# Altium PCB KORICHE_N1.PCBDOC
Units mm, origin at the board's own origin, x right, y up, seen from the top; angles counter-clockwise.
Board outline 62.87 x 50.17 mm, 2 copper layers (TopLayer, BottomLayer); 27 components, 22 nets, 105 pads, 16 vias.
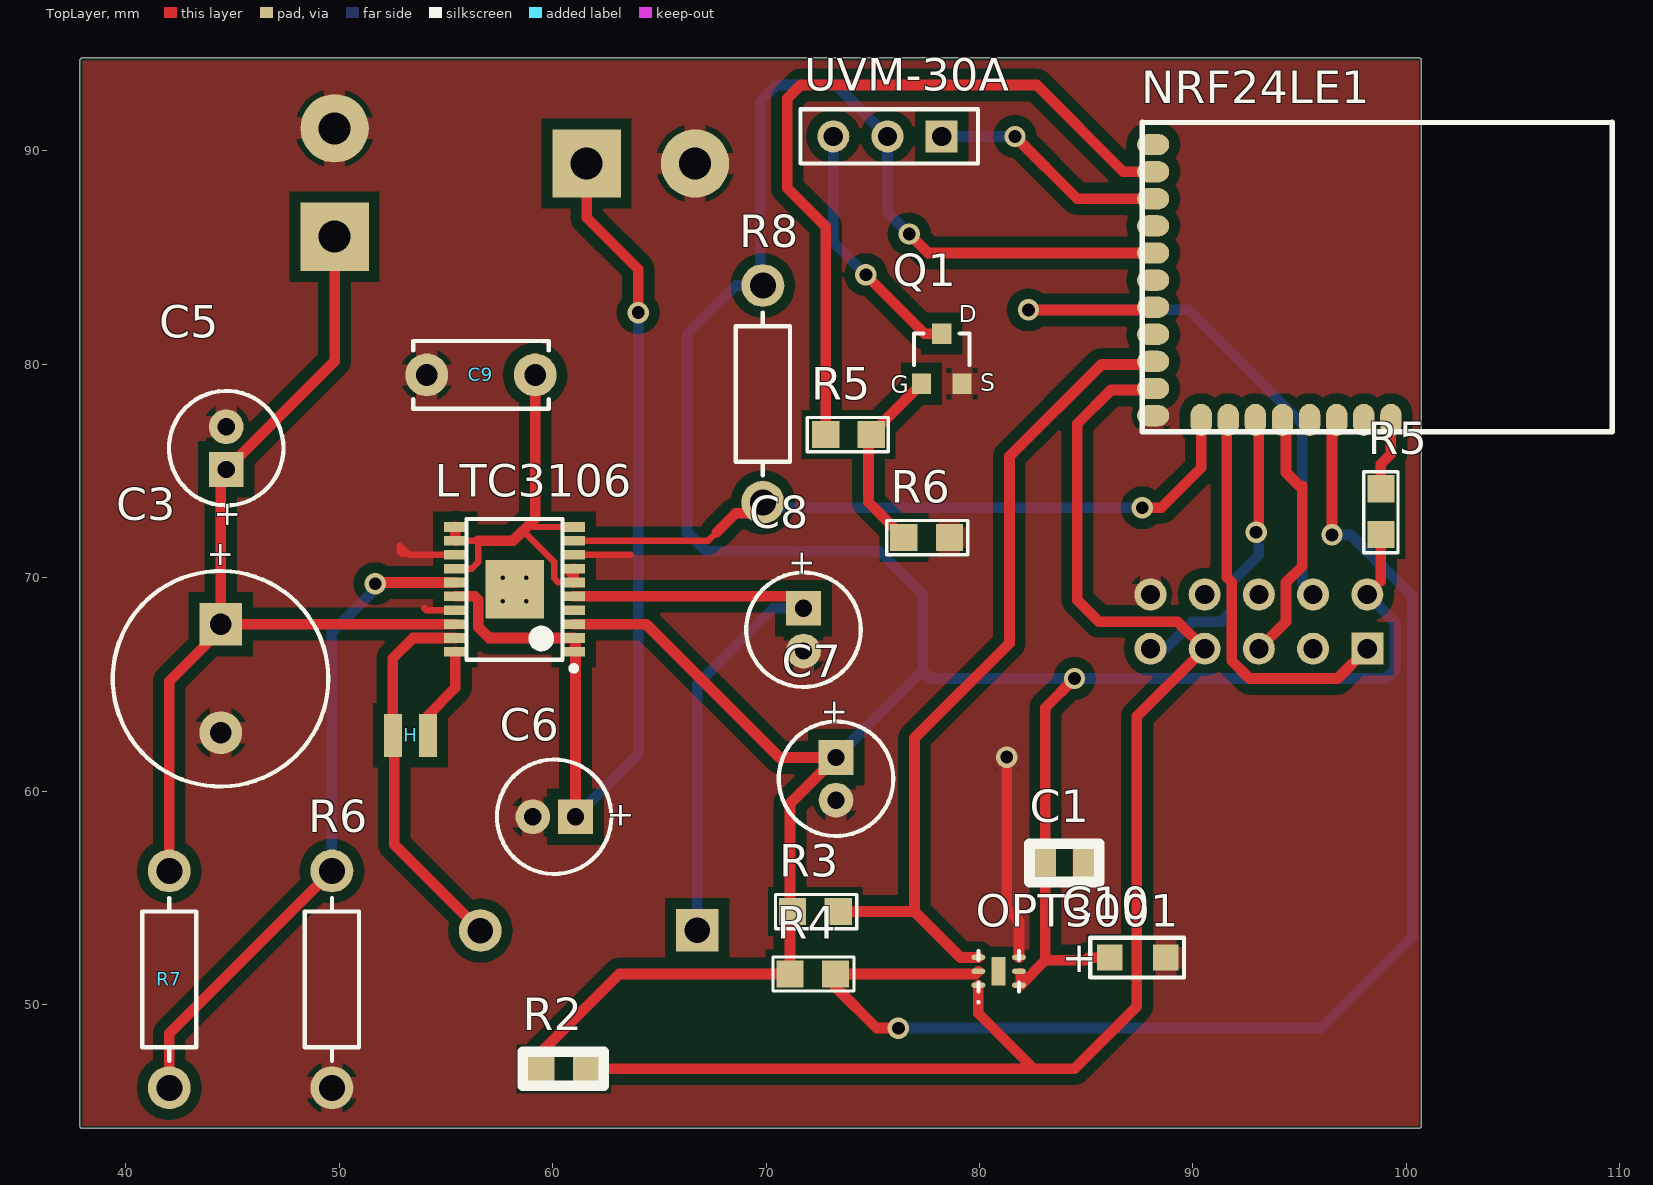
[diagram p0: TopLayer view]
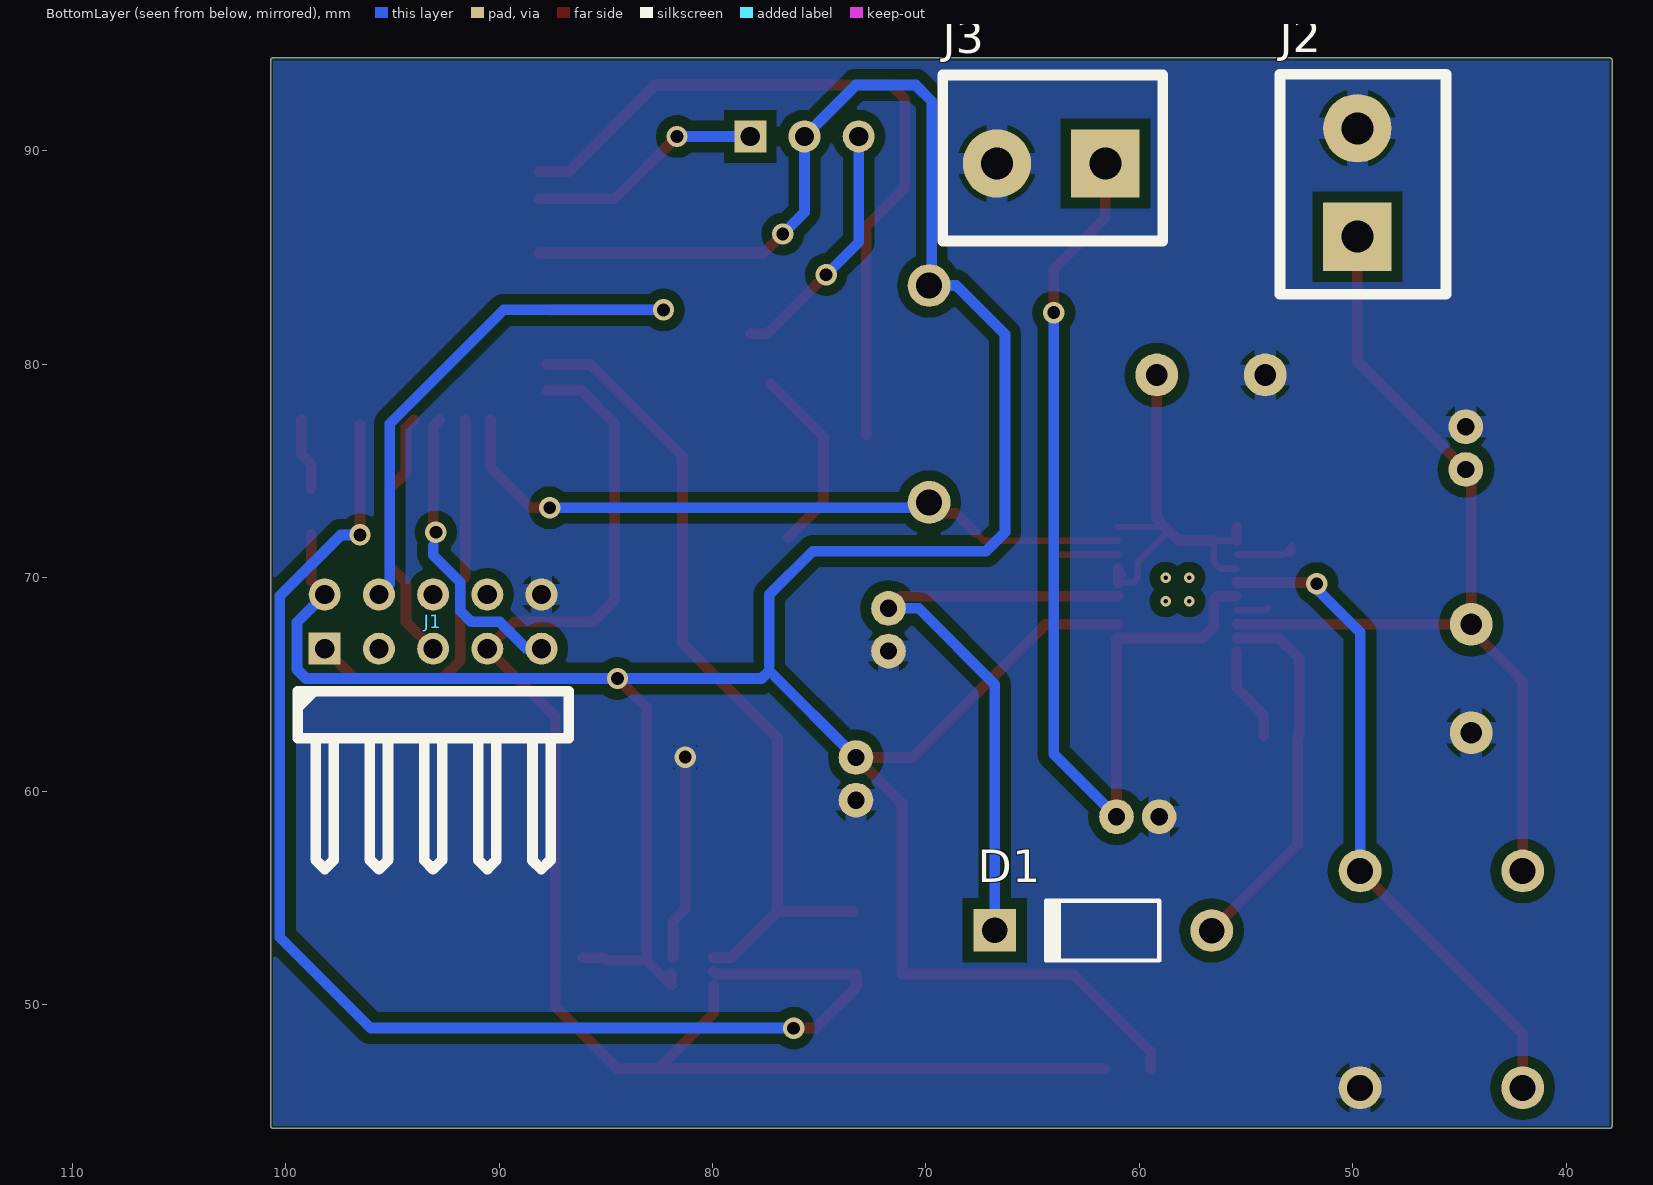
[diagram p1: BottomLayer view, seen from below]
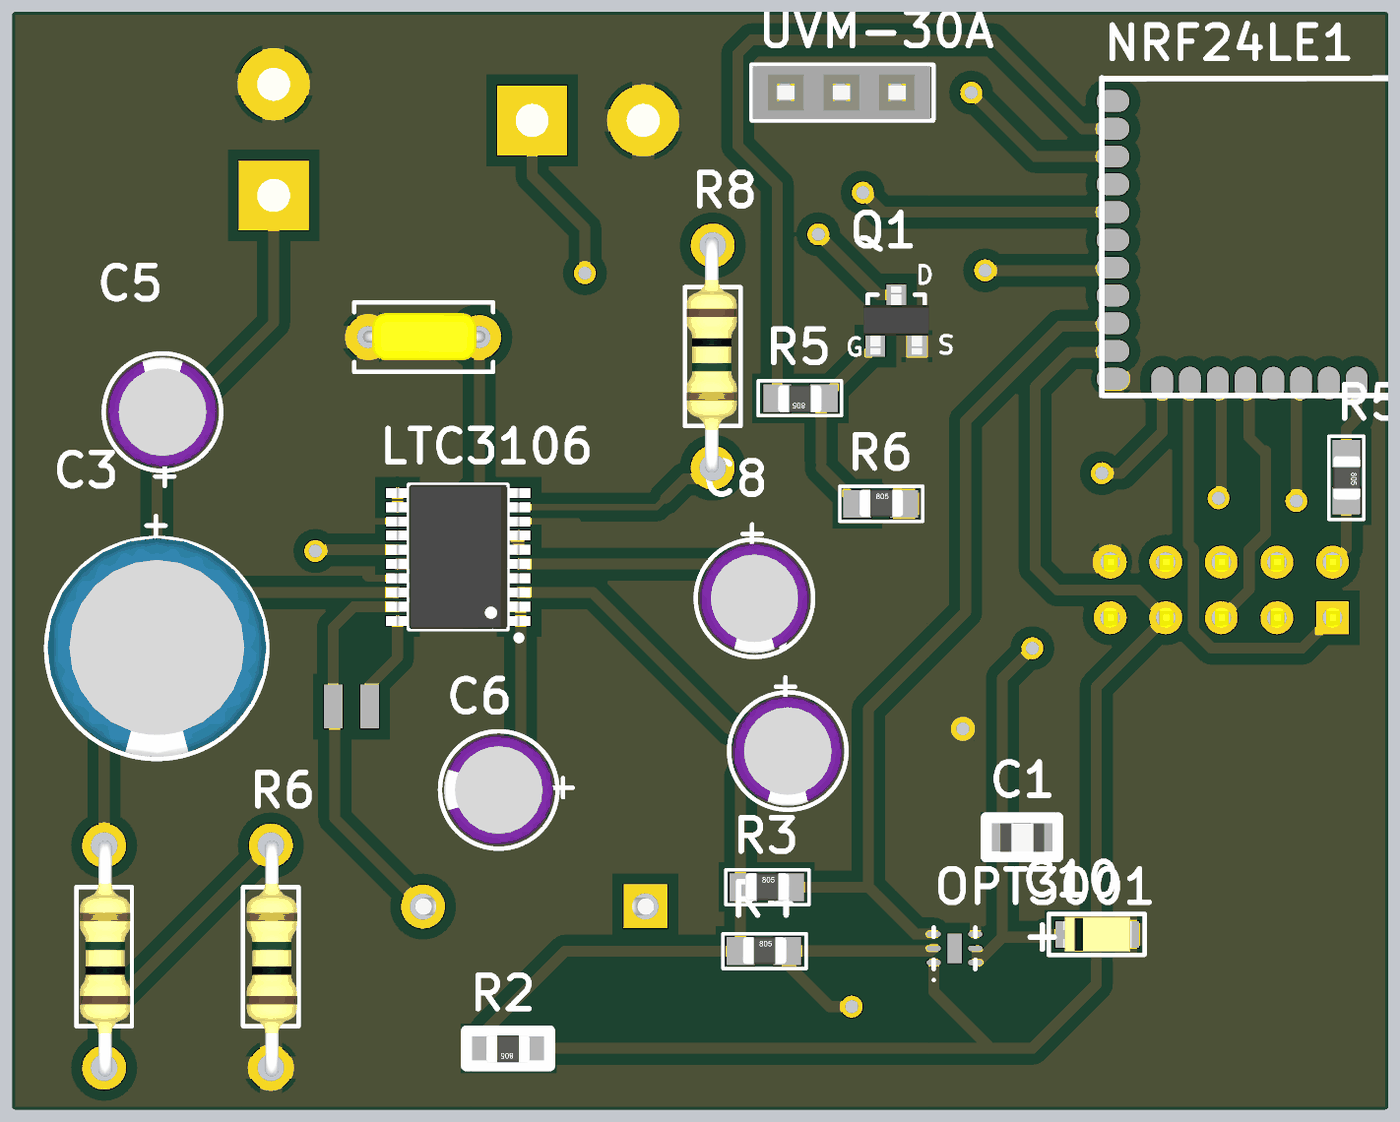
[diagram p2: 3D render of the assembled board from above, using the file's embedded part models]
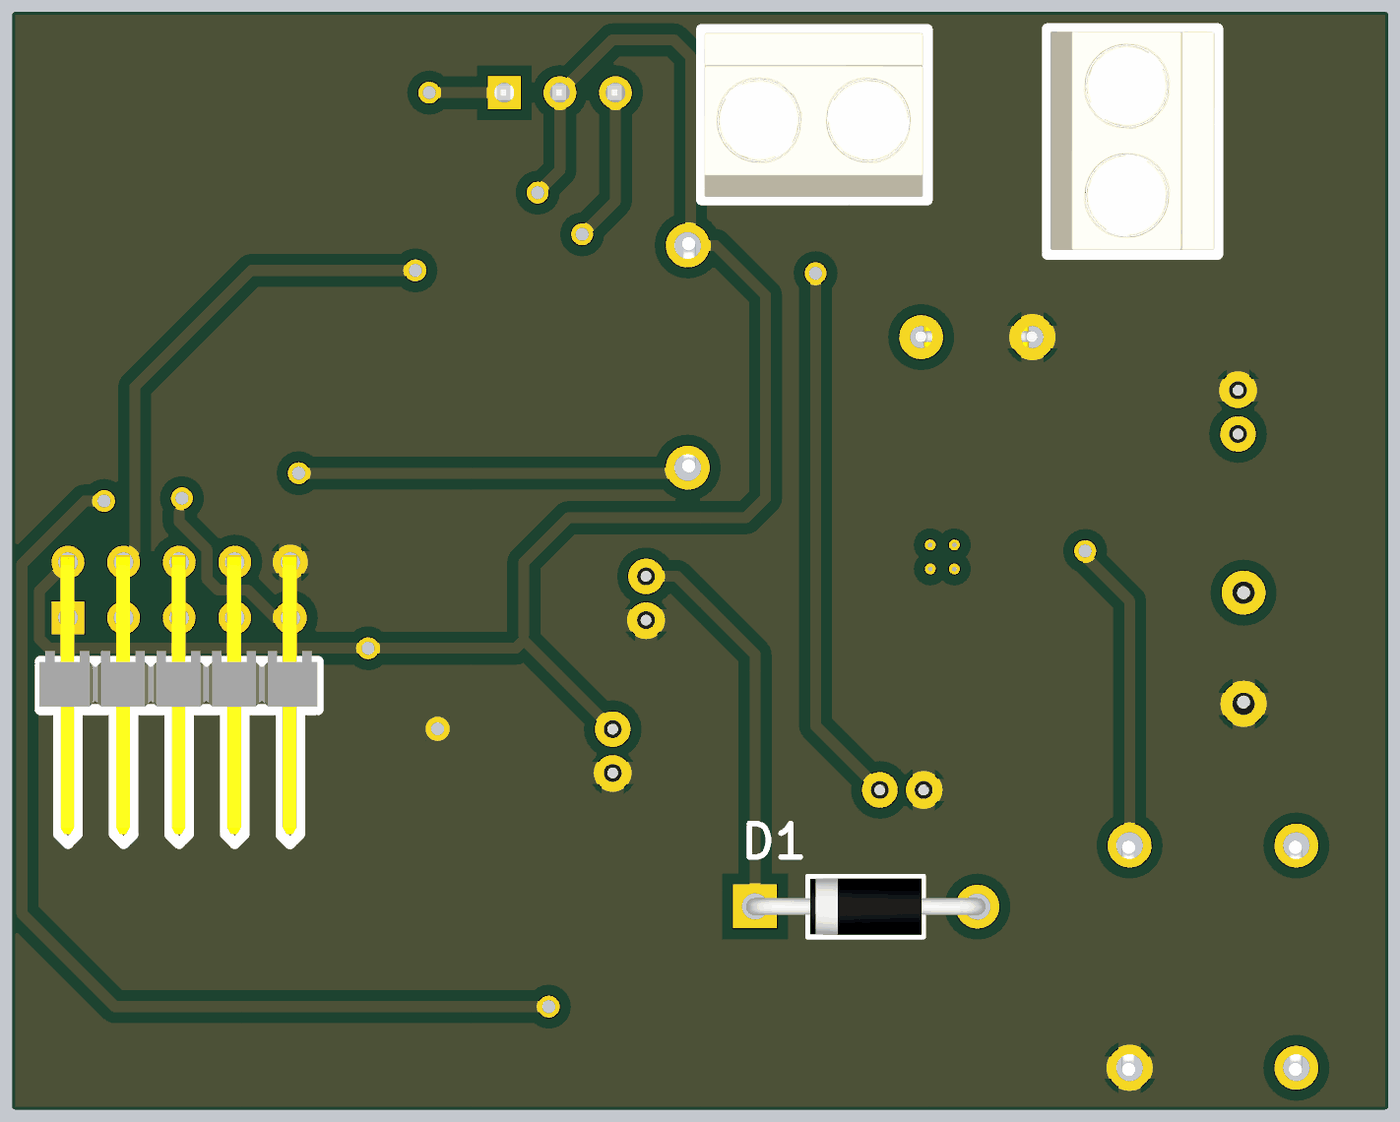
[diagram p3: 3D render of the assembled board from below, using the file's embedded part models]

## Layer stack, top to bottom
TopSolder: solder mask 0.0102, Solder Resist, Dk 3.5
TopLayer: signal copper 0.0356
Dielectric1: core 0.32, FR-4, Dk 4.8
BottomLayer: signal copper 0.0356
BottomSolder: solder mask 0.0102, Solder Resist, Dk 3.5

## Board outline
37.973,44.196 cw(c37.973,44.323) 37.846,44.323 37.846,94.234 cw(c37.973,94.234) 37.973,94.361 100.584,94.361 cw(c100.584,94.234) 100.711,94.234 100.711,44.323 cw(c100.584,44.323) 100.584,44.196

## Design rules (kind name [scope] priority, off if disabled: settings)
Clearance Clearance_11 [InNamedPolygon('GND_L02_P010')] p1: gap=0.5
Clearance Clearance_10 [InNamedPolygon('GND_L01_P008')] p2: gap=0.5
Clearance Clearance_9 [InNamedPolygon('bot-No Net')] p3: gap=0.5
Clearance Clearance_8 [InNamedPolygon('top-No Net')] p4: gap=0.5
Clearance Clearance_7 [InNamedPolygon('GND_L02_P036')] p5: gap=0.254
Clearance Clearance_6 [InNamedPolygon('NONET_L01_P004')] p6: gap=0.5
Clearance Clearance_5 [InNamedPolygon('NONET_L01_P004')] p7: gap=0.5
Clearance Clearance_4 [InNamedPolygon('NONET_L01_P004')] p8: gap=0.5
Clearance Clearance_3 [InNamedPolygon('NONET_L01_P004')] p9: gap=0.5
Clearance Clearance_2 [InNamedPolygon('NONET_L01_P004')] p10: gap=0.5
Clearance Clearance_1 [InNamedPolygon('NONET_L02_P005') Or  InNamedPolygon('NONET_L01_P004')] p11: gap=0.5
Clearance PowerPlaneClearance [InNamedPolygon('NONET_L02_P005') Or  InNamedPolygon('NONET_L01_P004')] p12: gap=1.016
Clearance [All] p13: gap=0.3
FabricationTestPointUsage TestPointUsage [All] p1: valid=0 allowmultiple=FALSE
FabricationTestpoint Testpoint [All] p1: side=3 testpointundercomponent=TRUE minsize=1.016 maxsize=2.54 preferedsize=1.524 minholesize=0.508 maxholesize=1.016 preferedholesize=0.813 testpointgrid=0.025 allowsidetop=TRUE allowsidebottom=TRUE usegrid=TRUE gridtolerance=0
Height [All] p1: minheight=0 maxheight=50.8 prefheight=12.7
HoleSize [All] p1: absolutevalues=TRUE maxlimit=7.62 minlimit=0.025 maxpercent=80.000 minpercent=20.000
PlaneClearance [All] p1: clearance=1.016
PlaneConnect [All] p1: planeconnectstyle=Relief reliefexpansion=0.5 reliefentries=4 reliefconductorwidth=1.016 reliefairgap=0.5
PolygonConnect [All] p1: connectstyle=Relief reliefconductorwidth=1.016 reliefentries=4 polygonreliefangle="90 Angle" airgapwidth=0.254
RoutingVias [All] p1: holewidth=0.6 width=1.524 viastyle="Through Hole" minholewidth=0.6 minwidth=1.524 maxholewidth=0.6 maxwidth=1.524
SilkToSolderMaskClearance SilkscreenOverComponentPads [IsPad] p1: minsilkscreentomaskgap=0.254 clearancetoexposedcopper=TRUE
SolderMaskExpansion [All] p1: expansion=0.05
Width [All] p1: maxlimit=3 minlimit=0.3 preferedwidth=0.5 minimp=50.000000 maximp=50.000000 favimp=50.000000
22 further rules are at their usual default settings.

## Classes and differential pairs
component class projet_pcb_GPE: C1 C3 C5 C6 C7 C8 C9 C10 D1 H J1 J2 J3 LTC3106 NRF24LE1 OPT3001 Q1 R2 R3 R4 R5 R6 R7 R8 UVM-30A

## Components (designator, comment, footprint, x,y, rotation, side; value= is the part's Value field where it differs from the comment)
C1 "CMS_0805" CONDENSATEUR_CMS_0805 83.087,56.642 r0 top
C3 "CONDENSATEUR_POL_ELECTROLY_RAD_5.08/10.16" CONDENSATEUR_POLARISE_ELECTROLYTIQUE_RADIAL_5.08/10.16 44.45,67.818 r270 top
C5 "CONDENSATEUR_POL_ELECTROLY_RAD_2.0/5.08" CONDENSATEUR_POLARISE_ELECTROLYTIQUE_RADIAL_2.0/5.08 44.704,76.073 r90 top
C6 "CONDENSATEUR_POL_ELECTROLY_RAD_2.0/5.08" CONDENSATEUR_POLARISE_ELECTROLYTIQUE_RADIAL_2.0/5.08 60.071,58.801 r180 top
C7 "CONDENSATEUR_POL_ELECTROLY_RAD_2.0/5.08" CONDENSATEUR_POLARISE_ELECTROLYTIQUE_RADIAL_2.0/5.08 73.279,60.579 r270 top
C8 "CONDENSATEUR_POL_ELECTROLY_RAD_2.0/5.08" CONDENSATEUR_POLARISE_ELECTROLYTIQUE_RADIAL_2.0/5.08 71.755,67.564 r270 top
C9 "CONDENSATEUR_CER_RAD_5.08" CONDENSATEUR_CERAMIQUE_RADIAL_5.08 59.182,79.502 r180 top
C10 "CMS_POLARISE_TANTALE_3216-18" CONDENSATEUR_CMS_POLARISE_TANTALE_A/3216-18 86.106,52.197 r0 top
D1 "DIODE_SCHOTTKY_DO41 : 1N5817" DIODE_DO41 61.722,53.467 r0 bottom
H "Bobine_22nH" SELF 53.34,62.611 r180 top
J1 "BARRETTE_5 CONTACTS_2 RANGEES_MALE_COUDEE" BARRETTE_5X2_M_C 98.171,66.675 r180 bottom
J2 "BORNIER2 DROIT A VIS" BORNIER2_A_VIS 49.784,85.979 r90 bottom
J3 "BORNIER2 DROIT A VIS" BORNIER2_A_VIS 61.595,89.408 r0 bottom
LTC3106 "LTC3106_Regulateur" ltc3106 47.117,81.153 r180 top
NRF24LE1 "NRF24LE1_32Pin" "NRF24LE1 SMD" 88.138,77.597 r90 top
OPT3001 "OPT 3001 Light" "opt3001 DPN 6" 80.899,51.562 r90 top
Q1 "TRANSISTOR_MOSFET-N_SOT23_GSD" TRANSISTOR_MOSFET-N_SOT23_GSD 78.232,80.264 r0 top
R2 "RESISTANCE_CMS_0805" RESISTANCE_CMS_0805 61.595,46.99 r180 top
R3 "RESISTANCE_CMS_0805" RESISTANCE_CMS_0805 71.247,54.356 r0 top
R4 "RESISTANCE_CMS_0805" RESISTANCE_CMS_0805 71.12,51.435 r0 top
R5 "RESISTANCE_CMS_0805" RESISTANCE_CMS_0805 74.93,76.708 r180 top
R5 "RESISTANCE_CMS_0805" RESISTANCE_CMS_0805 98.806,74.168 r270 top
R6 "RESISTANCE_CMS_0805" RESISTANCE_CMS_0805 76.454,71.882 r0 top
R6 "RESISTANCE_AXIALE_1/4W" RESISTANCE_1/4W 49.657,46.101 r90 top
R7 "RESISTANCE_AXIALE_1/4W" RESISTANCE_1/4W 42.037,46.101 r90 top
R8 "RESISTANCE_AXIALE_1/4W" RESISTANCE_1/4W 69.85,83.693 r270 top
UVM-30A "UVM-30A UV sensor" BARRETTE_3_F_D 78.232,90.678 r180 top

## Footprints (in the part's own frame and the unit in brackets; to place one, negate y for a bottom-side part, rotate by r counter-clockwise, add the part's x,y. Pads: shape width x height; smd on the part's side, far side on the other; paste and mask are expansions set on the pad)
BARRETTE_3_F_D [mm] "BARRETTE 3 CONTACTS ; 1 RANGEE ; DROITE ; FEMELLE ; ESPACEMENT BROCHES = 2.54 mm"
  rect 1.5x1.5 hole 0.9: 1(0,0)
  round 1.5 hole 0.9: 2(2.54,0) 3(5.08,0)
  silkscreen extent -1.7,-1.27 6.61,1.27, body extent -1.56,-1.21 6.56,1.2, height 8.5
BARRETTE_5X2_M_C [mm] "BARRETTE 5 CONTACTS ; 2 RANGEES ; COUDEE ; MALE ; ESPACEMENT BROCHES = 2.54 mm"
  rect 1.5x1.5 hole 0.9: 1(0,0)
  round 1.5 hole 0.9: 2(0,2.54) 3(2.54,0) 4(2.54,2.54) 5(5.08,0) 6(5.08,2.54) 7(7.62,0) 8(7.62,2.54) 9(10.16,0) 10(10.16,2.54)
  silkscreen extent -1.27,-10.34 11.43,-2, body extent -1.3,-9.9 11.4,2.86, height 5.64
BORNIER2_A_VIS [mm] "BORNIER 2 PLOTS A VIS ; VERTICAL ; ESPACEMENT BROCHES = 5.08mm"
  rect 3.2x3.2 hole 1.5: 1(0,0)
  round 3.2 hole 1.5: 2(5.08,0)
  silkscreen extent -2.69,-4.15 7.62,3.63, body extent -2.5,-4 7.5,3.5, height 10
CONDENSATEUR_CERAMIQUE_RADIAL_5.08 [mil] "CONDENSATEUR TRAVERSANT CERAMIQUE RADIAL ; DIMENSIONS : 3.17mm x 5.08mm"
  round 79 hole 40: 1(0,0) 2(200,0)
  silkscreen extent -25,-62 225,63, body extent -11,-43 209,42, height 148
CONDENSATEUR_CMS_0805 [mm] "CONDENSATEUR CMS 0805 ; DIMENSIONS : 2mm x 1.25mm"
  rect 1x1.3 smd: 1(0,0) 2(1.79,-0.01)
  silkscreen extent -0.74,-0.9 2.53,0.89, body extent -0.09,-0.67 1.91,0.64, height 0.73
CONDENSATEUR_CMS_POLARISE_TANTALE_A/3216-18 [mm] "CONDENSATEUR CMS POLARISE TANTALE BOITIER A ; DIMENSIONS : 3.2mm x 1.6mm"
  rect 1.2x1.22 smd: 1(0,0) 2(2.63,0)
  silkscreen extent -0.91,-0.93 3.48,0.94, body extent -0.28,-0.8 2.92,0.8, height 1.61
CONDENSATEUR_POLARISE_ELECTROLYTIQUE_RADIAL_2.0/5.08 [mil] "CONDENSATEUR POLARISE ELECTROLYTIQUE RADIAL ; DIAMETRE : 5.08mm ; ESPACEMENT BROCHES : 2mm"
  rect 64x64 / inner round 64 / far side round 64 hole 32: 1(-39.37,0)
  round 64 hole 32: 2(39.37,0)
  silkscreen extent -106,-106 106,105, body extent -98,-98 98,98, height 433
CONDENSATEUR_POLARISE_ELECTROLYTIQUE_RADIAL_5.08/10.16 [mil] "CONDENSATEUR POLARISE ELECTROLYTIQUE RADIAL ; DIAMETRE : 10.16mm ; ESPACEMENT BROCHES : 5.08mm"
  rect 79x79 / inner round 79 / far side round 79 hole 40: 1(0,0)
  round 79 hole 40: 2(200,0)
  silkscreen extent -98,-199 299,198, body extent -98,-197 295,197, height 630
DIODE_DO41 [mm] "DIODE DO41 ; DIMENSIONS : 5.2mm x 2.7mm ; PERCAGE : 0.8mm"
  round 2 hole 1.2: 1(-5.11,0)
  rect 2x2 hole 1.2: 2(5.05,-0.01)
  silkscreen extent -2.65,-1.4 2.75,1.4, body extent -5.47,-1.29 5.45,1.28, height 2.55
ltc3106 [mm] "TSOP, 20-Leads, Body 6,60x4,50mm, Pitch 0,65mm, Thermal Pad 2,74x2,74mm, IPC Medium Density"
  rect 1.05x0.45 smd: 1(-13.875,14.625) 2(-13.875,13.975) 3(-13.875,13.325) 4(-13.875,12.675) 5(-13.875,12.025) 6(-13.875,11.375) 7(-13.875,10.725) 8(-13.875,10.075) 9(-13.875,9.425) 10(-13.875,8.775) 11(-8.325,8.775) 12(-8.325,9.425) 13(-8.325,10.075) 14(-8.325,10.725) 15(-8.325,11.375) 16(-8.325,12.025) 17(-8.325,12.675) 18(-8.325,13.325) 19(-8.325,13.975) 20(-8.325,14.625)
  rect 2.74x2.74 smd: 21(-11.1,11.7)
  silkscreen extent -14,8.4 -8.85,15.52, body extent -14.4,8.4 -7.8,15, height 1.2
"NRF24LE1 SMD" [mm]
  oval 1.5x1 smd: 1(-0.2,-11.14) 2(-0.2,-9.87) 3(-0.2,-8.6) 4(-0.2,-7.33) 5(-0.2,-6.06) 6(-0.2,-4.79) 7(-0.2,-3.52) 8(-0.2,-2.25)
  oval 1x1.5 smd: 9(0,0) 10(1.27,0) 11(2.54,0) 12(3.81,0) 13(5.08,0) 14(6.35,0) 15(7.62,0) 16(8.89,0) 17(10.16,0) 18(11.43,0) 19(12.7,0)
  silkscreen extent -0.76,-21.51 13.75,0.51
"opt3001 DPN 6" [mm]
  oval 0.25x0.65 smd: 1(-0.65,-0.95) 2(0,-0.95) 3(0.65,-0.95) 4(0.65,0.95) 5(0,0.95) 6(-0.65,0.95)
  rect 1.35x0.65 smd: 7(0,0)
  silkscreen extent -1.5,-0.95 0.95,1, body extent -0.95,-0.95 0.95,0.95, height 0.65
RESISTANCE_1/4W [mil] "RESISTANCE 0.25W; DIAMETRE : 2.54mm ; LONGUEUR : 6.35mm ; PAS : 10.16mm"
  round 79 hole 48: 1(0,0) 2(400,0)
  silkscreen extent 50,-50 350,50, body extent -15,-47 409,44, height 116
RESISTANCE_CMS_0805 [mil] "RESISTANCE CMS 0805 ; DIMENSIONS : 2mm x 1.25mm"
  rect 50x50 smd: 1(0,0) 2(84,0)
  silkscreen extent -31,-31 118,31, body extent 4,-24 83,26, height 31
SELF [mm] "Precision Wire Wound Inductor, 2-Leads, Body 2,50x2,00mm, IPC Medium Density"
  rect 0.85x2 smd: 1(-0.825,0) 2(0.825,0)
  body extent -1.25,-1 1.25,1, height 1.2
TRANSISTOR_MOSFET-N_SOT23_GSD [mm] "SOT23 ; DIMENSIONS : 3.0mm x 2.5 mm"
  rect 0.9x0.95 smd: 1(-0.95,-1.175) 2(0.95,-1.175) 3(0,1.175)
  silkscreen extent -1.3,-0.3 1.3,1.18, body extent -1.5,-1.57 1.5,1.57, height 1.1

## Part data
C1: library part CONDENSATEUR_CMS_CER_0805, "CONDENSATEUR CMS CERAMIQUE 0805"
C3: "CONDENSATEUR POLARISE ELECTROLYTIQUE RADIAL 5.08/10.16"
C5 C6 C7 C8: "CONDENSATEUR POLARISE ELECTROLYTIQUE RADIAL 2.0/5.08"
C9: "CONDENSATEUR TRAVERSANT CERAMIQUE RADIAL 5.08mm"
C10: library part CONDENSATEUR_CMS_POL_TANT_A_3216-18, "CONDENSATEUR CMS POLARISE TANTALE BOITIER A/3216-18"
D1: "DIODE SCHOTTKY DO41 : 1N5817"
J1: "BARRETTE 5 CONTACTS 2 RANGEES MALE COUDEE"
J2 J3: library part "BORNIER2_DROIT_A VIS", "BORNIER 2 PLOTS DROIT A VIS 5.08mm"
LTC3106: library part "LTC31068FE PACKAGE", "LTC3106_Regulateur_MPC"
OPT3001: library part OPT_3001_Light_DNP, "OPT_3001_Light_DNP"
Q1: "TRANSISTOR MOSFET CANAL N BOITIER SOT23_GSD"
R2 R3 R4 R5 R5 R6: "RESISTANCE CMS 0805"
R6 R7 R8: "RESISTANCE TRAVERSANTE AXIALE 1/4W"
UVM-30A: library part UVM-30A_UV_SESNOR_3Pin, "UVM-30A_UV_SESNOR_3Pin"

## Via types
v1: diameter 1, hole 0.6, TopLayer to BottomLayer, 12 vias
v2: diameter 0.5, hole 0.2, TopLayer to BottomLayer, 4 vias

## Nets (pads, with @x,y where several pads share a name; then routed paths per layer and width w, separated by ;. In a path a pad name is that pad's centre, name@x,y a point inside that pad or via, vN(x,y) a via of type N, cw(c..) or ccw(c..) an arc to the next point about the centre after c; other vN are vias at no path point)
1: C6.1 J3.1 LTC3106.1 LTC3106.2 LTC3106.16 | length 48.3
  TopLayer w0.5: LTC3106.16 56.348,69.128 56.515,68.961 56.515,67.691 57.028,67.178 LTC3106.2 LTC3106.2@60.992,67.099 ; C6.1 LTC3106.2@61.071,67.099 ; J3.1 61.595,86.868 64.008,84.455 v1(64.008,82.423)
  BottomLayer w0.5: C6.1 64.008,61.738 v1(64.008,82.423)
FCSN: J1.5 NRF24LE1.5 | length 12.1
  TopLayer w0.5: J1.5 94.361,67.945 94.361,69.783 95.123,70.545 95.123,74.295 94.996,74.295 94.361,74.93 94.361,77.024 NRF24LE1.5@93.988,77.397
FMISO: J1.9 NRF24LE1.6 | length 13.5
  TopLayer w0.5: NRF24LE1.6@92.788,77.397 93.091,77.094 v1@93.091,72.136
  BottomLayer w0.5: J1.9 88.713,66.675 89.983,67.945 91.313,67.945 91.821,68.453 91.821,69.783 93.091,71.053 93.091,71.501
  other v1: 92.964,72.136
FMOSI: J1.1 NRF24LE1.7 | length 18.7
  TopLayer w0.5: NRF24LE1.7@91.588,77.397 91.588,70.016 91.821,69.783 91.821,66.107 92.65,65.278 96.774,65.278 J1.1
GND: C1.2 C3.2 C5.2 C6.2 C7.2 C8.2 C9.2 C10.2 J1.10 J2.2 J3.2 LTC3106.8 LTC3106.13 LTC3106.17 NRF24LE1.9 OPT3001.3 Q1.2 R6.1@49.657,46.101 R6.2@78.588,71.882 | length 17.3
  TopLayer w0.3: 53.975,68.58 54.077,68.478 LTC3106.17 ; LTC3106.13 53.255,71.078 53.213,71.12 ; LTC3106.8 63.669,71.078 ; 53.213,71.12 52.832,71.501 52.832,71.226 52.938,71.12 53.213,71.12
  TopLayer w0.508: v1(81.28,61.595) 81.28,54.483 81.849,53.914 OPT3001.3
GrilleMOS: NRF24LE1.18 R5.2@72.796,76.708 | length 35.6
  TopLayer w0.5: R5.2@72.796,76.708 72.796,86.462 70.993,88.265 70.993,92.456 71.628,93.091 82.677,93.091 86.741,89.027 NRF24LE1.18
INT: NRF24LE1.3 OPT3001.5 R4.2 | length 63
  TopLayer w0.508: v1(76.2,48.895) 75.184,48.895 73.254,50.825 R4.2 79.822,51.435 OPT3001.5 ; v1(96.52,72.009) 96.52,76.708 96.522,76.71 NRF24LE1.3@96.522,77.181
  BottomLayer w0.508: v1(76.2,48.895) 96.012,48.895 100.275,53.158 100.275,69.143 97.409,72.009 v1(96.52,72.009)
Lum_SCL: NRF24LE1.11 OPT3001.4 R3.2 | length 38.8
  TopLayer w0.508: R3.2 76.962,54.356 ; OPT3001.4 79.106,52.212 76.962,54.356 ; NRF24LE1.11@87.757,79.997 85.712,79.997 81.407,75.692 81.407,66.929 76.962,62.484 76.962,54.356
Lum_SDA: J1.7 NRF24LE1.10 OPT3001.6 R2.1 | length 68.6
  TopLayer w0.5: R2.1 82.55,46.99 ; OPT3001.6 79.949,49.591 82.55,46.99 ; 87.376,50.91 87.376,49.911 84.455,46.99 82.55,46.99 ; 87.376,51.14 87.376,53 ; 87.376,53.23 87.376,63.5 J1.7 89.281,67.945 85.598,67.945 84.582,68.961 84.582,77.216 86.163,78.797 NRF24LE1.10@87.757,78.797
NetC8_1: C8.1 D1.2 LTC3106.5 | length 29
  TopLayer w0.5: LTC3106.5 71.191,69.128 C8.1
  BottomLayer w0.5: D1.2 66.772,64.994 70.342,68.564 C8.1
NetH_1: H.1 LTC3106.20 | length 4.4
  TopLayer w0.5: H.1 54.165,63.563 55.442,64.84 LTC3106.20
NetNRF24LE1_1: NRF24LE1.1 R5.1@98.806,74.168 | length 3.4
  TopLayer w0.5: R5.1@98.806,74.168 98.806,75.311 99.278,75.783 NRF24LE1.1
NetQ1_1: Q1.1 R5.1@74.93,76.708 R6.1@76.454,71.882 | length 8.5
  TopLayer w0.5: 74.803,73.533 R6.1@76.454,71.882 ; 74.803,73.787 R5.1@74.803,76.581 ; R5.1@74.93,76.708 74.93,76.737 Q1.1
NetQ1_3: Q1.3 UVM-30A.3 | length 11.8
  TopLayer w0.5: v1(74.676,84.201) 77.438,81.439 Q1.3
  BottomLayer w0.5: UVM-30A.3 73.152,85.725 v1(74.676,84.201)
PGOOD: LTC3106.9 NRF24LE1.8 R8.2 | length 32.6
  TopLayer w0.3: LTC3106.9 67.283,71.728 67.691,72.136
  TopLayer w0.5: 67.691,72.136 68.58,73.025 R8.2@69.342,73.025 ; v1(87.63,73.279) 88.519,73.279 90.388,75.148 NRF24LE1.8
  BottomLayer w0.5: R8.2 70.104,73.279 v1(87.63,73.279)
PROG: J1.4 NRF24LE1.13 | length 28.6
  TopLayer w0.5: v1(82.296,82.55) 82.299,82.547 NRF24LE1.13@87.607,82.547
  BottomLayer w0.5: v1(82.296,82.55) 89.789,82.55 95.123,77.216 95.123,69.723 J1.4
RUN: LTC3106.15 R6.2@49.657,56.261 R7.1 | length 31.4
  TopLayer w0.5: R7.1 42.037,48.641 R6.2@49.657,56.261 ; v1(51.689,69.723) 51.744,69.778 LTC3106.15
  BottomLayer w0.5: R6.2@49.657,56.261 49.657,67.437 51.689,69.469 v1(51.689,69.723)
SHT: D1.1 H.2 LTC3106.19 | length 17.8
  TopLayer w0.5: LTC3106.19 53.462,67.178 52.515,66.231 H.2 52.578,62.548 52.578,57.501 D1.1
Solar_Cell: C3.1 C5.1 J2.1 LTC3106.18 R7.2 | length 43.7
  TopLayer w0.5: R7.2 42.037,65.151 C3.1@44.45,67.564 ; C3.1 44.45,74.819 C5.1 49.784,80.153 J2.1 ; C3.1@44.46,67.828 LTC3106.18
UV_OUT: NRF24LE1.17 UVM-30A.1 | length 11.1
  TopLayer w0.5: v1(81.661,90.678) 84.582,87.757 NRF24LE1.17
  BottomLayer w0.5: UVM-30A.1 v1(81.661,90.678)
VCC: C1.1 C7.1 C10.1 J1.2 LTC3106.3 NRF24LE1.15 OPT3001.1 OPT3001.2 R2.2 R3.1 R4.1 R5.2@98.806,72.034 R8.1 UVM-30A.2 | length 155.3
  TopLayer w0.5: R2.2 59.461,47.777 63.119,51.435 R4.1 71.12,59.42 C7.1 70.628,61.579 64.379,67.828 LTC3106.3 ; v1(76.708,86.106) 77.597,85.217 NRF24LE1.15 ; OPT3001.2@81.929,51.457 81.929,50.912 83.087,52.07 ; v1(84.455,65.278) 83.087,63.91 83.087,52.07 ; 84.963,52.07 83.087,52.07 ; 85.09,52.197 C10.1 ; 98.806,69.85 R5.2@98.806,72.034
  BottomLayer w0.5: C7.1 77.343,65.643 77.708,65.278 v1(84.455,65.278) 99.052,65.278 99.471,65.697 99.471,67.915 J1.2 ; v1(76.708,86.106) 75.692,87.122 UVM-30A.2 73.279,93.091 70.485,93.091 69.723,92.329 69.723,83.82 R8.1 68.58,83.693 66.294,81.407 66.294,72.136 67.183,71.247 75.311,71.247 77.343,69.215 77.343,65.913
VCCR: C9.1 LTC3106.6 LTC3106.7 LTC3106.10 LTC3106.11 LTC3106.12 LTC3106.14 | length 21.2
  TopLayer w0.3: LTC3106.14 56.204,70.428 56.515,70.739 56.515,71.728 LTC3106.12 ; 58.801,72.009 60.071,70.739 60.071,69.977 60.27,69.778 LTC3106.6 ; 58.801,72.378 LTC3106.10 ; 60.751,70.186 LTC3106.7
  TopLayer w0.5: LTC3106.12 LTC3106.11 ; 56.515,71.728 58.139,71.728 59.182,72.771 C9.1@59.182,80.264 ; LTC3106.6 LTC3106.7
pads on no net: J1.3 J1.6 J1.8 LTC3106.4 LTC3106.21 NRF24LE1.2 NRF24LE1.4 NRF24LE1.12 NRF24LE1.14 NRF24LE1.16 NRF24LE1.19 OPT3001.7
copper on no net:
  other v2: 57.667,68.903 58.767,68.903 57.667,70.003 58.767,70.003

## Polygon pours and split planes (outlines as drawn)
GND on TopLayer "GND_L01_P008" (solid, remove dead copper, pour order 8): 37.973,94.234 100.584,94.234 100.584,44.323 37.973,44.323
GND on BottomLayer "GND_L02_P010" (solid, remove dead copper, pour order 10): 37.973,94.234 100.584,94.234 100.584,44.323 37.973,44.323

## Other copper
TopLayer:

## Silkscreen, mask and mechanical layers (free items; w line width, h text height)
Mechanical15:
  lines w0.254: 37.973,44.323 100.584,44.323 100.584,94.234 37.973,94.234 37.973,44.323

## Text inside footprints (layer, text, board x,y; h text height)
C3: TopOverlay "+" at 43.96,71.728 h1.14 r270
C5: TopOverlay "+" at 45.254,72.293 h1.14 r90
C6: TopOverlay "+" at 63.851,59.351 h1.14 r180
C7: TopOverlay "+" at 72.729,64.359 h1.14 r270
C8: TopOverlay "+" at 71.205,71.344 h1.14 r270
C10: TopOverlay "+" at 83.856,51.517 h1.43
Q1: TopOverlay "D" at 79.032,81.964 h0.8; TopOverlay "S" at 80.032,78.764 h0.8; TopOverlay "G" at 75.832,78.664 h0.8